# EAGLE board RAFT_DuckLink_RFH (EAGLE 9.5.2), part 1 of 2
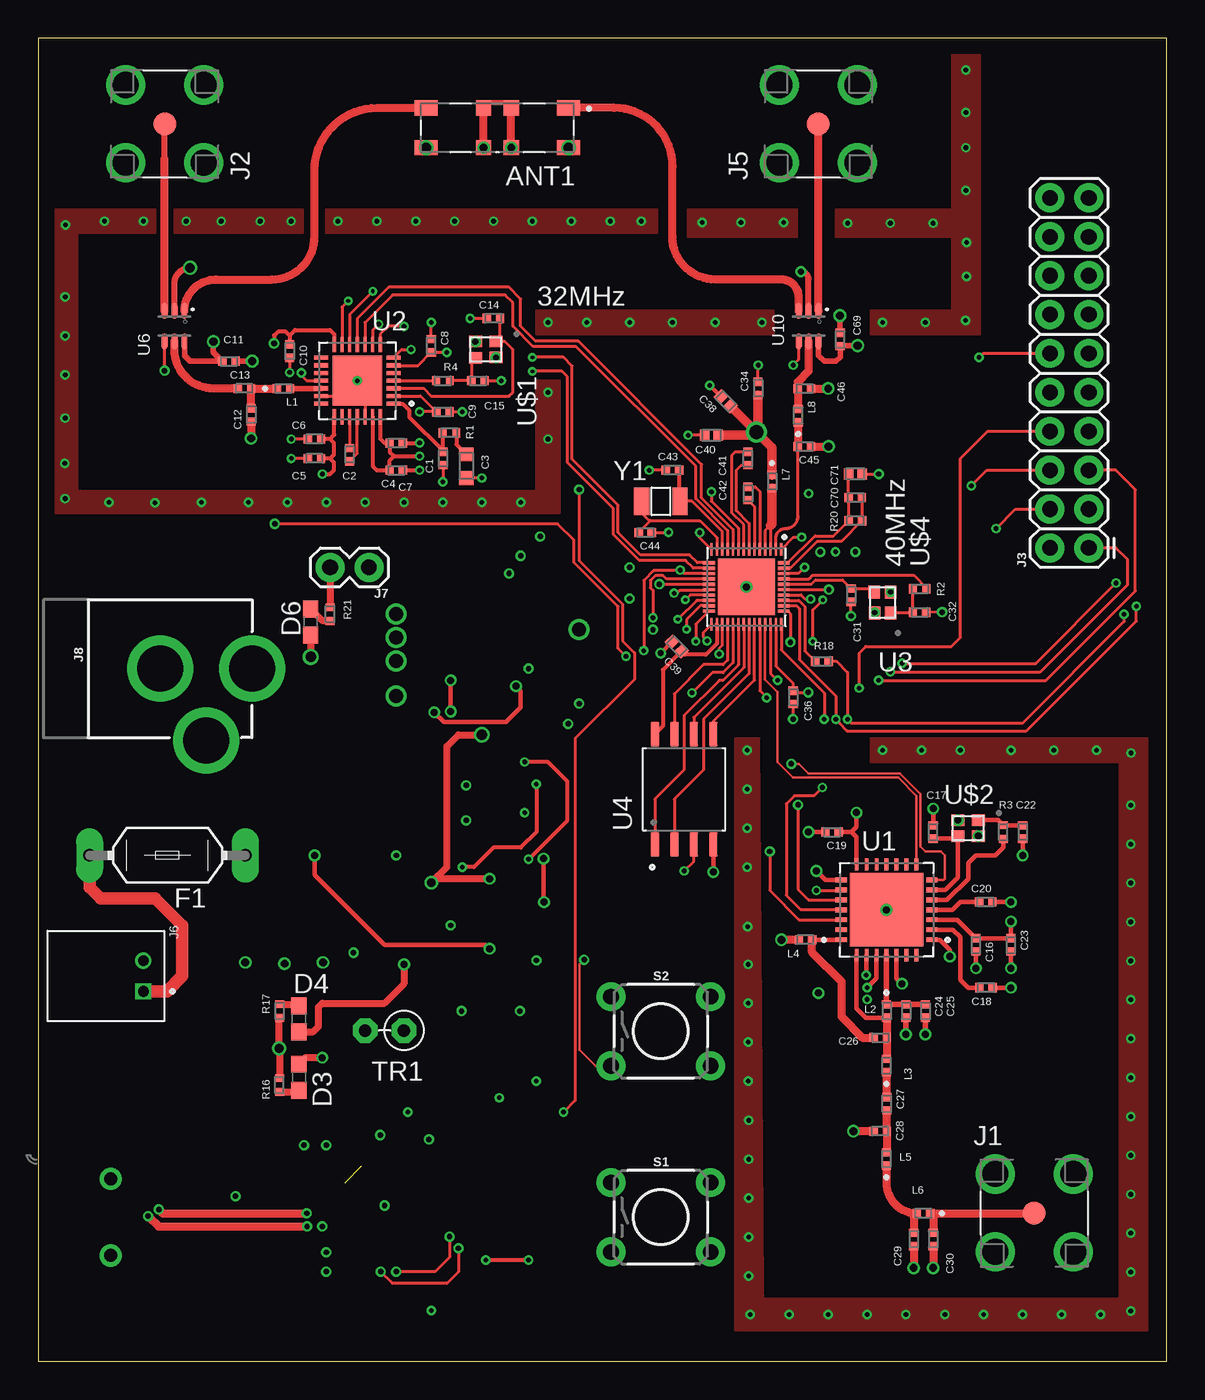
[diagram p0: board, top side]
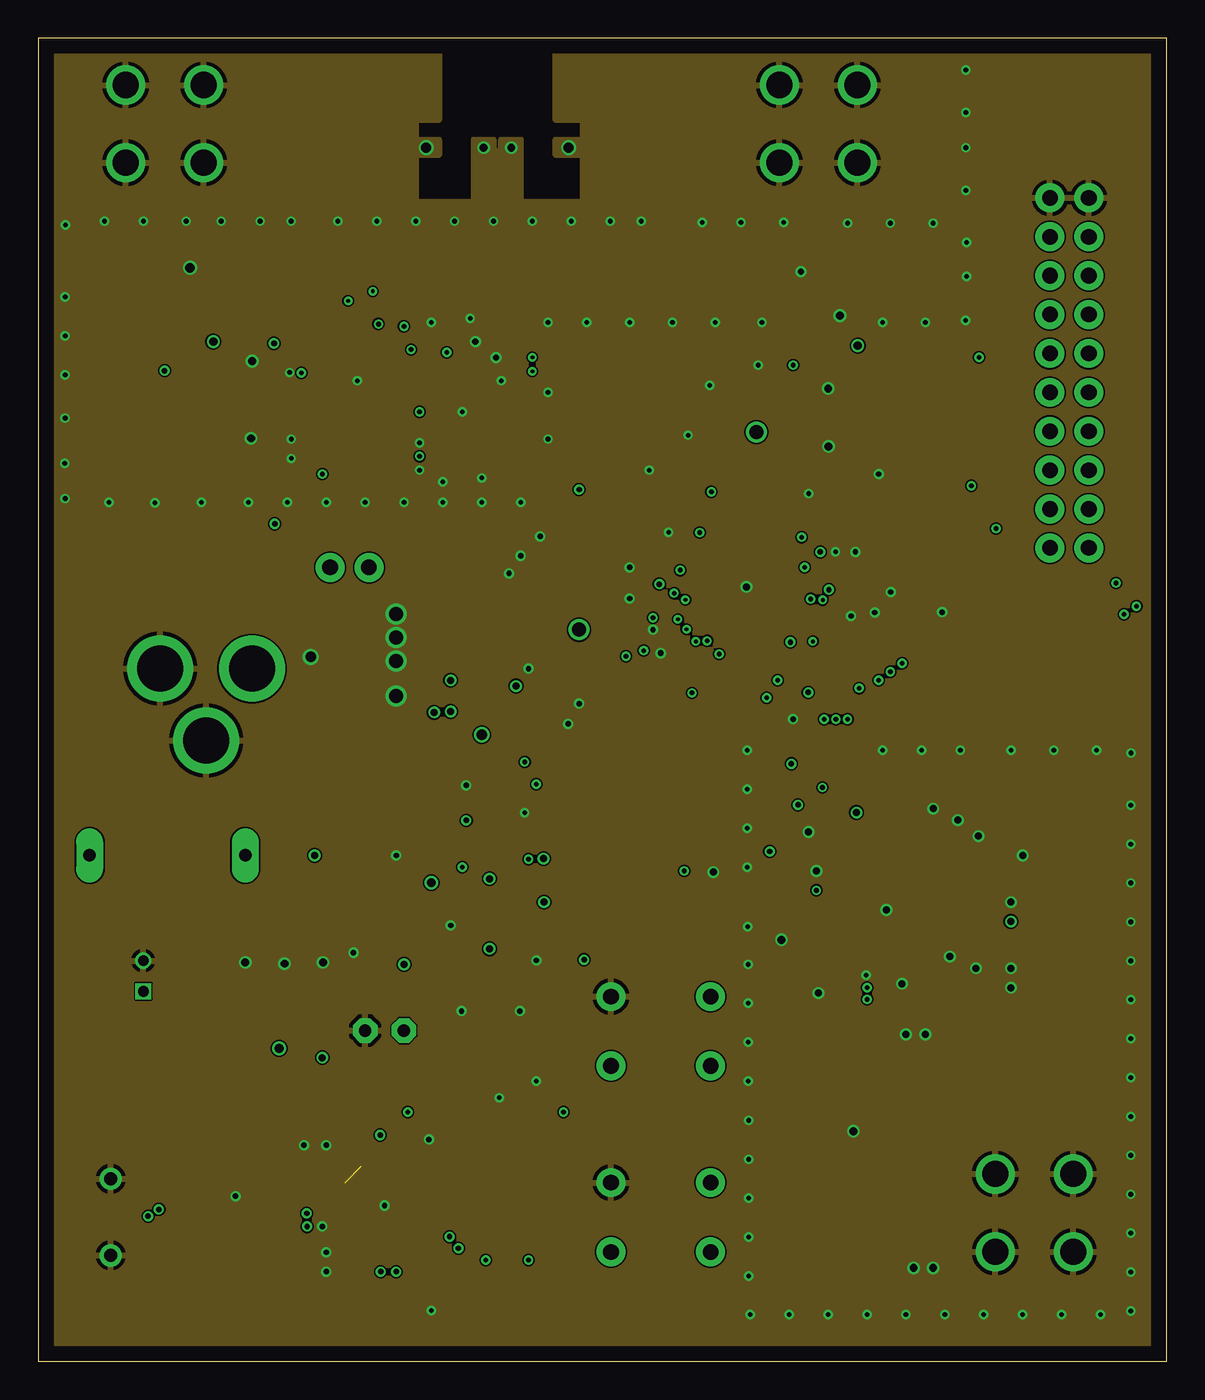
[diagram p1: board, inner layer GND]
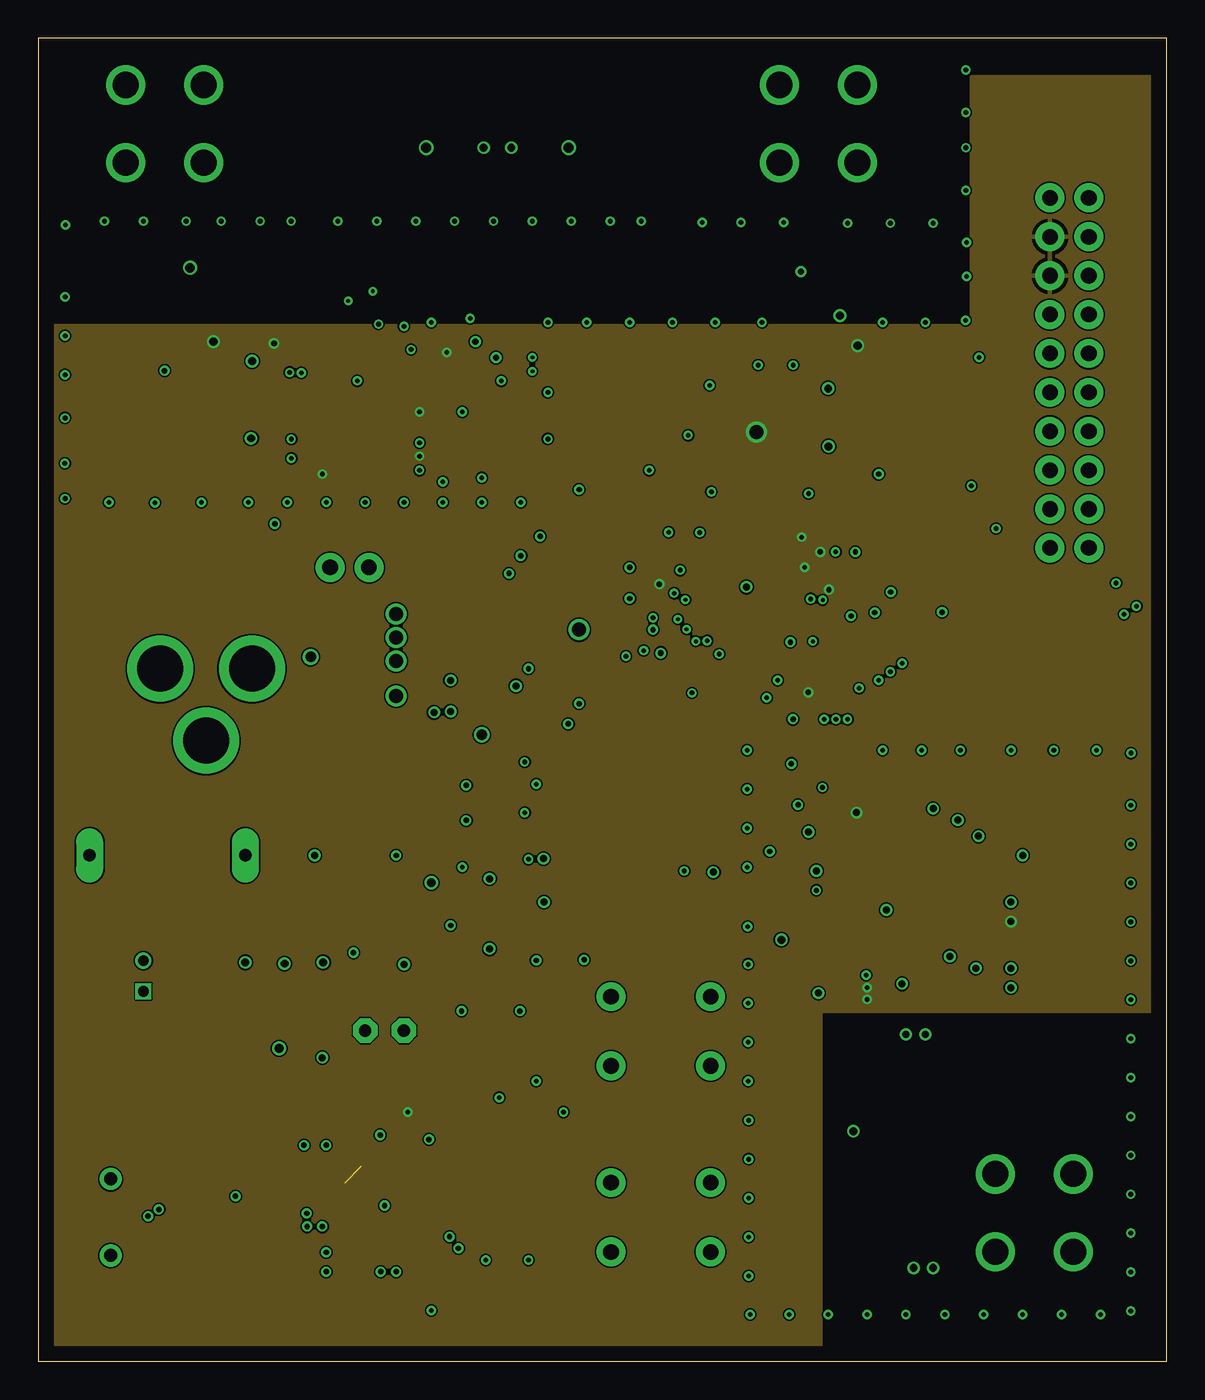
[diagram p2: board, inner layer 3V3]
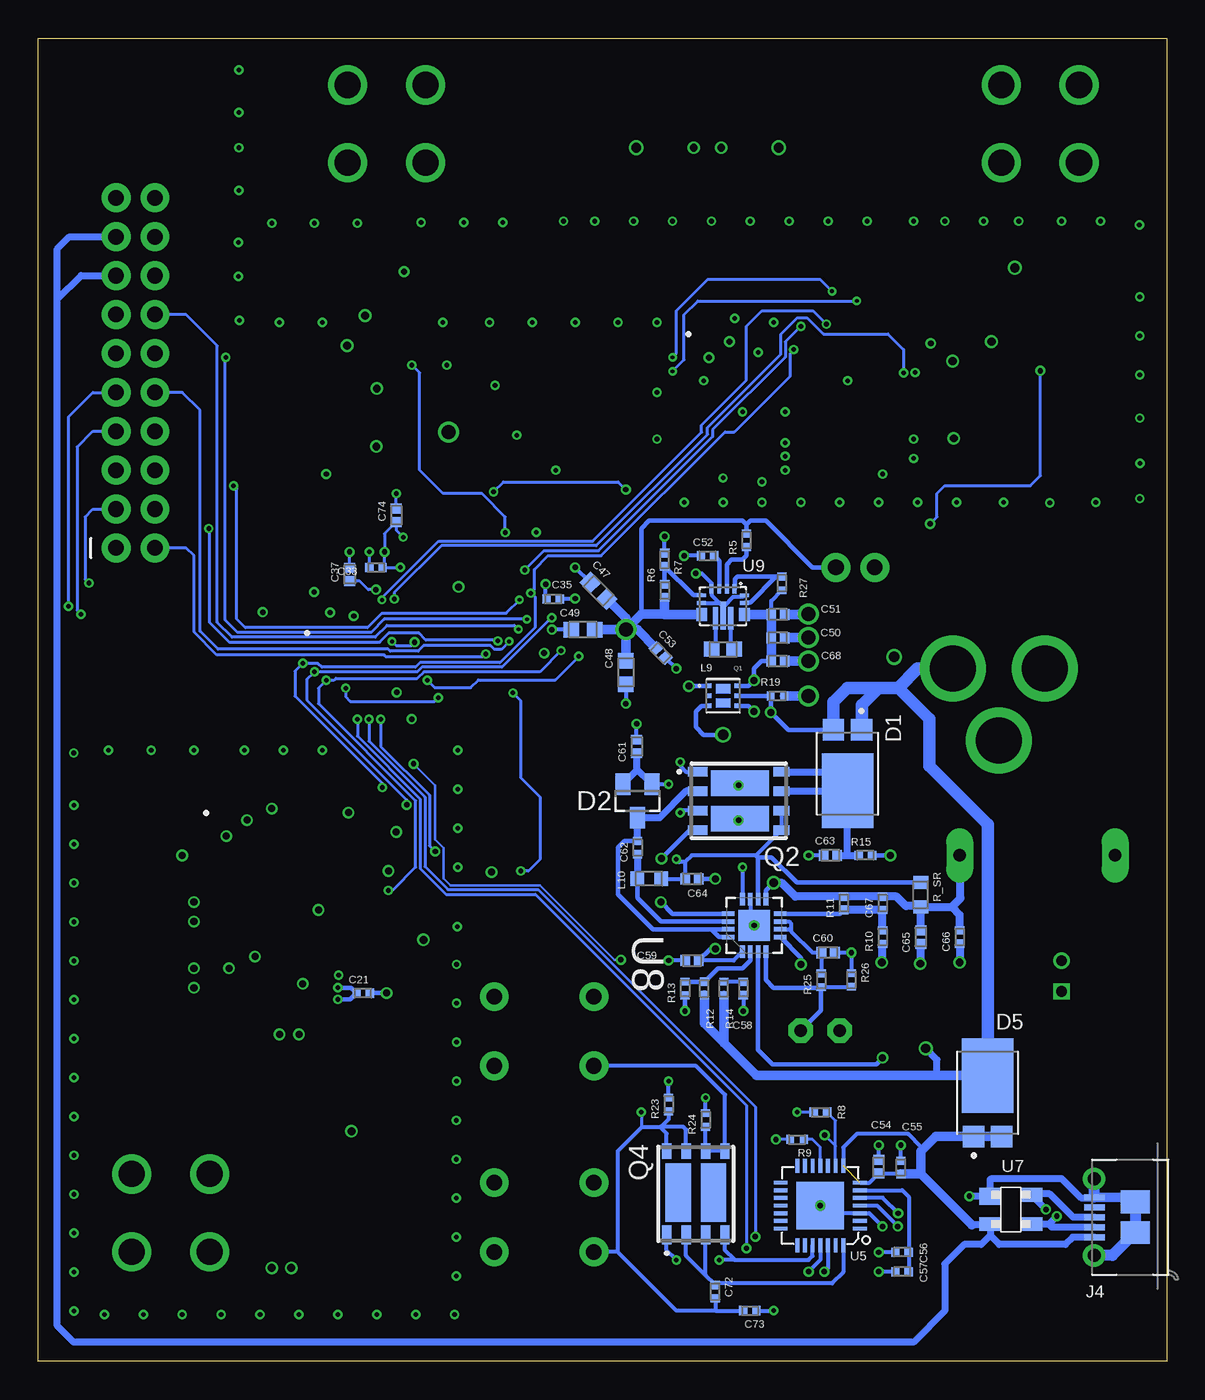
[diagram p3: board, bottom side, seen from below]

Size 73.66 x 86.36 mm. Coordinates in mm from the lower left corner, seen from the top.
Outline: 0,0 73.66,0 73.66,86.36 0,86.36 0,0
Copper layers (1+2*15+16): Top 0.05mm / dielectric 7.5mil / GND 0.035mm / dielectric 40mil / 3V3 0.035mm / dielectric 7.5mil / Bottom 0.05mm
Design rules "default *": minimum track width 6mil, minimum drill 6mil, track to track 4mil, track to pad 4mil, pad to pad 4mil, via to via 6mil, smd to smd 4mil, copper to edge 40mil, drill to drill 6mil, minimum pad ring 6mil, minimum via ring 6mil, stop-mask expansion 6mil, vias tented up to drill 6mil, thermal gap 10mil

## Footprints (pad centres in the part's own frame; a part is rotated, then mirrored left to right if it is on the bottom)
ANT_2450AD47A1590E = smd 1.5 x 1: 1 -4.65,-1.3; 4 4.65,-1.3; 5 4.65,1.3; 8 -4.65,1.3 | smd 1 x 1: 2 -0.9,-1.3; 3 0.9,-1.3; 6 0.9,1.3; 7 -0.9,1.3
CAPC1005X55N = smd 0.54 x 0.6: 1 -0.432,0; 2 0.432,0
CAPC1608X90N = smd 0.89 x 0.93: 1 -0.77,0; 2 0.77,0
CAPC1005X70N = smd 0.64 x 0.72: 1 -0.439,0; 2 0.439,0
CAPC1608X100N = smd 1 x 1.02: 1 -0.759,0; 2 0.759,0
DIO_PDS1040-13 = smd 1.4 x 1.39: 1 -2.856,0.92; 2 -2.856,-0.92 | smd 4.86 x 3.36: 3 1.126,0
SOT23 = smd 1 x 1.4: 1 -0.95,-1.1; 2 0.95,-1.1; 3 0,1.1
0603 = smd 1.1 x 1: 1 -0.85,0; 2 0.85,0
LITTLEFUSE = drill 0.813 pad 1.778 long: 1 -5.08,0; 2 5.08,0
AMPHENOL_132134-15 = smd 1.5 x 1.5: 1 0,0 | drill 1.7: P1 -2.54,2.54; P2 2.54,2.54; P3 2.54,-2.54; P4 -2.54,-2.54
2X10 = drill 1.016 pad 1.88: 1 0,0; 2 0,2.54; 3 2.54,0; 4 2.54,2.54; 5 5.08,0; 6 5.08,2.54; 7 7.62,0; 8 7.62,2.54; 9 10.16,0; 10 10.16,2.54; 11 12.7,0; 12 12.7,2.54; 13 15.24,0; 14 15.24,2.54; 15 17.78,0; 16 17.78,2.54; 17 20.32,0; 18 20.32,2.54; 19 22.86,0; 20 22.86,2.54
MOLEX_105017-0001 = smd 0.4 x 1.35: 1 -1.3,2.675; 2 -0.65,2.675; 3 0,2.675; 4 0.65,2.675; 5 1.3,2.675 | drill 0.85 pad 1.45: P$1 -2.5,2.7; P$2 2.5,2.7 | smd 1.5 x 1.9: P$8 -1,0; P$9 1,0
JST_S2B-PH-K-S(LF)(SN) = drill 0.7 square: 1 1,0 | drill 0.7: 2 -1,0
1X02 = drill 1.016 pad 1.88: 1 0,0; 2 2.54,0
POWER_JACK_PTH = drill 2.997 pad 4.318: GND 0,7.7; GNDBREAK 4.7,10.7; PWR 0,13.7
INDC1005X55N = smd 0.54 x 0.6: 1 -0.432,0; 2 0.432,0
INDC1608X95N = smd 1 x 0.97: 1 -0.735,0; 2 0.735,0
INDC1608X90N = smd 0.87 x 0.93: 1 -0.78,0; 2 0.78,0
POWERPAKSC-70 = smd 0.325 x 0.3: 1 -0.912,0.65; 2 -0.912,0; 3 -0.912,-0.65; 4 0.912,-0.65; 5 0.912,0; 6 0.912,0.65 | smd 0.95 x 0.613: 7 0,-0.467; 8 0,0.467
POWERPAK-SO8_1 = smd 1.27 x 0.61: 1 -2.67,1.905; 2 -2.67,0.635; 3 -2.67,-0.635; 4 -2.67,-1.905 | smd 1.02 x 0.61: 5 2.795,-1.905; 6 2.795,-0.635; 7 2.795,0.635; 8 2.795,1.905 | smd 3.81 x 1.65: 9 0.09,-1.155; 10 0.09,1.155
RESC1005X40N = smd 0.51 x 0.6: 1 -0.445,0; 2 0.445,0
RESC1005X35N = smd 0.56 x 0.6: 1 -0.435,0; 2 0.435,0
RESC1608X55N = smd 0.87 x 0.98: 1 -0.8,0; 2 0.8,0
TACTILE_SWITCH_PTH_6.0MM = drill 1.016 pad 1.88: 1 -3.251,2.261; 2 3.251,2.261; 3 -3.251,-2.261; 4 3.251,-2.261
RS-2,5 = drill 0.813 pad 1.6 octagon: 1 -1.27,0; 2 1.27,0
QFN65P600X600X100-29N = smd 0.81 x 0.32: 1 -2.955,1.95; 2 -2.955,1.3; 3 -2.955,0.65; 4 -2.955,0; 5 -2.955,-0.65; 6 -2.955,-1.3; 7 -2.955,-1.95; 15 2.955,-1.95; 16 2.955,-1.3; 17 2.955,-0.65; 18 2.955,0; 19 2.955,0.65; 20 2.955,1.3; 21 2.955,1.95 | smd 0.32 x 0.81: 8 -1.95,-2.955; 9 -1.3,-2.955; 10 -0.65,-2.955; 11 0,-2.955; 12 0.65,-2.955; 13 1.3,-2.955; 14 1.95,-2.955; 22 1.95,2.955; 23 1.3,2.955; 24 0.65,2.955; 25 0,2.955; 26 -0.65,2.955; 27 -1.3,2.955; 28 -1.95,2.955 | smd 4.8 x 4.8: 29 0,0
QFN50P500X500X80-29N = smd 0.99 x 0.27: 1 -2.36,1.5; 2 -2.36,1; 3 -2.36,0.5; 4 -2.36,0; 5 -2.36,-0.5; 6 -2.36,-1; 7 -2.36,-1.5; 15 2.36,-1.5; 16 2.36,-1; 17 2.36,-0.5; 18 2.36,0; 19 2.36,0.5; 20 2.36,1; 21 2.36,1.5 | smd 0.27 x 0.99: 8 -1.5,-2.36; 9 -1,-2.36; 10 -0.5,-2.36; 11 0,-2.36; 12 0.5,-2.36; 13 1,-2.36; 14 1.5,-2.36; 22 1.5,2.36; 23 1,2.36; 24 0.5,2.36; 25 0,2.36; 26 -0.5,2.36; 27 -1,2.36; 28 -1.5,2.36 | smd 3.25 x 3.25: 29 0,0
QFN35P500X500X90-49N = smd 0.81 x 0.2: 1 -2.445,2.275; 2 -2.445,1.925; 3 -2.445,1.575; 4 -2.445,1.225; 5 -2.445,0.875; 6 -2.445,0.525; 7 -2.445,0.175; 8 -2.445,-0.175; 9 -2.445,-0.525; 10 -2.445,-0.875; 11 -2.445,-1.225; 12 -2.445,-1.575; 13 -2.445,-1.925; 14 -2.445,-2.275; 25 2.445,-2.275; 26 2.445,-1.925; 27 2.445,-1.575; 28 2.445,-1.225; 29 2.445,-0.875; 30 2.445,-0.525; 31 2.445,-0.175; 32 2.445,0.175; 33 2.445,0.525; 34 2.445,0.875; 35 2.445,1.225; 36 2.445,1.575; 37 2.445,1.925; 38 2.445,2.275 | smd 0.2 x 0.81: 15 -1.575,-2.445; 16 -1.225,-2.445; 17 -0.875,-2.445; 18 -0.525,-2.445; 19 -0.175,-2.445; 20 0.175,-2.445; 21 0.525,-2.445; 22 0.875,-2.445; 23 1.225,-2.445; 24 1.575,-2.445; 39 1.575,2.445; 40 1.225,2.445; 41 0.875,2.445; 42 0.525,2.445; 43 0.175,2.445; 44 -0.175,2.445; 45 -0.525,2.445; 46 -0.875,2.445; 47 -1.225,2.445; 48 -1.575,2.445 | smd 3.7 x 3.7: 49 0,0
SOIC127P790X216-8N = smd 1.61 x 0.58: 1 -3.605,1.905; 2 -3.605,0.635; 3 -3.605,-0.635; 4 -3.605,-1.905; 5 3.605,-1.905; 6 3.605,-0.635; 7 3.605,0.635; 8 3.605,1.905
QFN28G_0.5-5X5MM = smd 0.9 x 0.254: 1 -2.59,1.5; 2 -2.59,1; 3 -2.59,0.5; 4 -2.59,0; 5 -2.59,-0.5; 6 -2.59,-1; 7 -2.59,-1.5; 15 2.59,-1.5; 16 2.59,-1; 17 2.59,-0.5; 18 2.59,0; 19 2.59,0.5; 20 2.59,1; 21 2.59,1.5 | smd 0.254 x 0.9: 8 -1.5,-2.59; 9 -1,-2.59; 10 -0.5,-2.59; 11 0,-2.59; 12 0.5,-2.59; 13 1,-2.59; 14 1.5,-2.59; 22 1.5,2.59; 23 1,2.59; 24 0.5,2.59; 25 0,2.59; 26 -0.5,2.59; 27 -1,2.59; 28 -1.5,2.59 | smd 3.1 x 3.1: 29 0,0
SOT65P215X110-6N = smd 1.05 x 0.4: 1 -1,0.65; 2 -1,0; 3 -1,-0.65; 4 1,-0.65; 5 1,0; 6 1,0.65
SOT143 = smd 1.4 x 1.1: 1 -1.35,0.86 | smd 1.4 x 0.9: 2 -1.35,-0.96; 3 1.35,-0.96; 4 1.35,0.96
QFN50P350X350X100-17N = smd 0.813 x 0.305: 1 -1.702,0.762; 2 -1.702,0.254; 3 -1.702,-0.254; 4 -1.702,-0.762; 9 1.702,-0.762; 10 1.702,-0.254; 11 1.702,0.254; 12 1.702,0.762 | smd 0.305 x 0.813: 5 -0.762,-1.702; 6 -0.254,-1.702; 7 0.254,-1.702; 8 0.762,-1.702; 13 0.762,1.702; 14 0.254,1.702; 15 -0.254,1.702; 16 -0.762,1.702 | smd 2.032 x 2.032: 17 0,0
QFN50P250X300X100-15N = smd 0.6 x 0.25: 1 -1.15,0.75; 2 -1.15,0.25; 3 -1.15,-0.25; 4 -1.15,-0.75 | smd 0.25 x 0.6: 5 -0.725,-1.4; 6 -0.225,-1.4; 14 -0.225,1.4; 15 -0.725,1.4 | smd 0.85 x 0.7: 7-8 0.525,-1.4; 12-13 0.525,1.4 | smd 1.45 x 0.35: 9 0.775,-0.5; 11 0.775,0.5 | smd 1.8 x 0.35: 10 0.6,0
SMD-4 = smd 0.85 x 0.75: 1 -0.675,-0.525; 2 0.675,-0.525; 3 0.675,0.535; 4 -0.675,0.525
OSCCC150X320X80-2N = smd 1 x 1.8: 1 -1.25,0; 2 1.25,0

## Placement (x,y rotation side)
ANT1  2450AD47A1590E  [ANT_2450AD47A1590E]  29.97,80.52 180 top
C1  15pF  [CAPC1005X55N]  26.42,58.93 90 top
C2  470pF  [CAPC1005X55N]  20.32,59.18 90 top
C3  750pF  [CAPC1608X90N]  27.94,58.42 90 top
C4  0.1uF  [CAPC1005X55N]  23.37,59.94 180 top
C5  100pF  [CAPC1005X55N]  18.03,58.93 0 top
C6  0.1uF  [CAPC1005X55N]  18.03,60.2 0 top
C7  0.1uF  [CAPC1005X55N]  23.37,58.17 180 top
C8  0.1uF  [CAPC1005X55N]  25.65,66.29 270 top
C9  0.1uF  [CAPC1005X55N]  26.42,61.98 180 top
C10  0.1uF  [CAPC1005X55N]  16.41,65.94 90 top
C11  1nF  [CAPC1005X55N]  12.45,65.28 180 top
C12  1.7pF  [CAPC1005X55N]  13.89,61.77 90 top
C13  470pF  [CAPC1005X55N]  13.46,63.5 0 top
C14  10nF  [CAPC1005X55N]  29.72,68.07 0 top
C15  10nF  [CAPC1005X55N]  28.7,64.01 180 top
C16  0.1uF  [CAPC1005X55N]  61.21,27.18 270 top
C17  15pF  [CAPC1005X55N]  58.42,34.54 270 top
C18  0.1uF  [CAPC1005X55N]  61.87,24.38 0 top
C19  0.1uF  [CAPC1005X55N]  51.82,34.54 180 top
C20  0.1uF  [CAPC1005X55N]  61.85,29.97 0 top
C21  0.1uF  [CAPC1005X55N]  52.45,24.03 0 bottom
C22  15pF  [CAPC1005X55N]  64.26,34.54 90 top
C23  47nF  [CAPC1005X55N]  63.5,27.18 270 top
C24  47nF  [CAPC1005X55N]  56.64,22.86 90 top
C25  10nF  [CAPC1005X55N]  57.91,22.86 90 top
C26  1.5pF  [CAPC1005X55N]  54.97,21.13 180 top
C27  33pF  [CAPC1005X55N]  55.4,16.81 270 top
C28  4.7pF  [CAPC1005X55N]  54.97,15.01 0 top
C29  4.7pF  [CAPC1005X55N]  57.15,7.95 90 top
C30  1.8pF  [CAPC1005X55N]  58.42,7.95 90 top
C31  15pF  [CAPC1005X55N]  53.06,50.01 90 top
C32  15pF  [CAPC1005X55N]  57.53,48.9 180 top
C33  100pF  [CAPC1005X55N]  51.61,51.82 180 bottom
C34  0.1uF  [CAPC1005X55N]  46.99,63.5 90 top
C35  0.1uF  [CAPC1005X55N]  40.06,49.76 180 bottom
C36  0.1uF  [CAPC1005X55N]  49.28,43.33 90 top
C37  1uF  [CAPC1005X70N]  53.34,51.36 90 bottom
C38  1uF  [CAPC1005X70N]  44.88,62.66 135 top
C39  1uF  [CAPC1005X70N]  41.68,46.66 315 top
C40  10uF  [CAPC1005X70N]  43.94,60.45 180 top
C41  270pF  [CAPC1005X55N]  46.33,58.93 270 top
C42  270pF  [CAPC1005X55N]  46.33,56.64 90 top
C43  15pF  [CAPC1005X55N]  41.4,58.17 0 top
C44  15pF  [CAPC1005X55N]  39.62,54.1 180 top
C45  15pF  [CAPC1005X55N]  50.01,59.72 180 top
C46  15pF  [CAPC1005X55N]  50.01,63.5 180 top
C47  22uF  [CAPC1608X100N]  37.08,50.29 315 bottom
C48  22uF  [CAPC1608X100N]  35.31,44.96 90 bottom
C49  22uF  [CAPC1608X100N]  38.1,47.75 0 bottom
C50  10uF  [CAPC1005X70N]  25.37,47.22 0 bottom
C51  10uF  [CAPC1005X70N]  25.37,48.74 0 bottom
C52  0.1uF  [CAPC1005X55N]  29.97,52.58 180 bottom
C53  10uF  [CAPC1005X70N]  33.02,46.23 315 bottom
C54  1.0uF  [CAPC1005X70N]  18.8,12.7 270 bottom
C55  0.1uF  [CAPC1005X55N]  17.35,12.65 270 bottom
C56  0.1uF  [CAPC1005X55N]  17.27,7.11 0 bottom
C57  4.7uF  [CAPC1005X55N]  17.27,5.84 0 bottom
C58  2.2uF  [CAPC1005X55N]  27.64,24.33 90 bottom
C59  1.0uF  [CAPC1005X70N]  30.99,26.16 180 bottom
C60  1.0uF  [CAPC1005X70N]  22.1,26.67 0 bottom
C61  1.0uF  [CAPC1005X70N]  34.59,40.13 90 bottom
C62  0.1uF  [CAPC1005X55N]  34.54,33.53 90 bottom
C63  10uF  [CAPC1005X70N]  21.95,33.02 0 bottom
C64  10uF  [CAPC1005X70N]  30.99,31.5 180 bottom
C65  10uF  [CAPC1005X70N]  16.05,27.69 90 bottom
C66  4.7uF  [CAPC1005X55N]  13.51,27.69 90 bottom
C67  22pF  [CAPC1005X55N]  18.54,29.9 90 bottom
C68  10uF  [CAPC1005X70N]  25.37,45.69 0 bottom
C69  1nF  [CAPC1005X55N]  52.35,66.7 270 top
C70  3.3nF  [CAPC1005X55N]  53.34,56.39 180 top
C71  10uF  [CAPC1005X70N]  53.34,57.91 0 top
C72  0.1uF  [CAPC1005X55N]  29.46,4.55 270 bottom
C73  2.2uF  [CAPC1005X55N]  27.2,3.3 180 bottom
C74  1uF  [CAPC1005X70N]  50.29,55.22 90 bottom
D1  PDS1040-13  [DIO_PDS1040-13]  20.83,38.35 270 bottom
D2  BAT54C  [SOT23]  34.54,36.58 180 bottom
D3  LTST-C190GKT  [0603]  17.02,18.54 270 top
D4  LTST-C190GKT  [0603]  17.02,22.35 90 top
D5  PDS1040-13  [DIO_PDS1040-13]  11.68,17.53 90 bottom
D6  LTST-C190GKT  [0603]  17.78,48.26 90 top
F1  [LITTLEFUSE]  8.43,33.02 180 top
J1  AMPHENOL_132134  [AMPHENOL_132134-15]  65.02,9.68 90 top
J2  AMPHENOL_132134  [AMPHENOL_132134-15]  8.26,80.77 0 top
J3  [2X10]  68.58,53.09 90 top
J4  Micro-USB  [MOLEX_105017-0001]  2.03,9.4 90 bottom
J5  132134-15  [AMPHENOL_132134-15]  50.93,80.77 0 top
J6  S2B-PH-K-S(LF)(SN)  [JST_S2B-PH-K-S(LF)(SN)]  6.86,25.15 270 top
J7  [1X02]  21.59,51.82 180 top
J8  POWER_JACK  [POWER_JACK_PTH]  0.25,45.21 270 top
L1  6.8nH  [INDC1005X55N]  16,63.5 180 top
L2  33nF  [INDC1005X55N]  55.37,22.86 90 top
L3  10nH  [INDC1005X55N]  55.37,19.3 270 top
L4  5.6nH  [INDC1005X55N]  50.09,27.51 0 top
L5  8.2nH  [INDC1005X55N]  55.37,13.21 270 top
L6  7.5nH  [INDC1005X55N]  57.78,9.65 0 top
L7  2nH  [INDC1005X55N]  47.9,57.43 90 top
L8  5.6nH  [INDC1005X55N]  49.61,61.72 270 top
L9  1.5uH  [INDC1608X95N]  28.96,46.48 180 bottom
L10  10uH  [INDC1608X90N]  33.78,31.5 0 bottom
Q1  SIA817EDJ  [POWERPAKSC-70]  28.96,43.43 0 bottom
Q2  SI7288DP  [POWERPAK-SO8_1]  27.94,36.58 0 bottom
Q4  SI7288DP  [POWERPAK-SO8_1]  30.73,10.92 90 bottom
R1  15K  [RESC1005X40N]  26.85,60.6 0 top
R2  0R  [RESC1005X40N]  57.53,50.42 180 top
R3  0R  [RESC1005X40N]  62.99,34.54 270 top
R4  0R  [RESC1005X40N]  26.42,64.01 180 top
R5  100k  [RESC1005X40N]  27.43,53.59 90 bottom
R6  470k  [RESC1005X35N]  32.77,50.29 90 bottom
R7  150k  [RESC1005X35N]  32.77,52.32 270 bottom
R8  4.7k  [RESC1005X35N]  22.61,16.26 180 bottom
R9  10k  [RESC1005X40N]  24.13,14.48 180 bottom
R10  100k  [RESC1005X40N]  18.54,27.69 90 bottom
R11  499R  [RESC1005X35N]  21.08,29.9 90 bottom
R12  499R  [RESC1005X35N]  30.18,24.33 270 bottom
R13  36k  [RESC1005X40N]  31.45,24.33 90 bottom
R14  2k  [RESC1005X40N]  28.91,24.33 270 bottom
R15  10  [RESC1005X35N]  19.66,33.02 0 bottom
R16  10K  [RESC1005X40N]  15.75,18.03 270 top
R17  10K  [RESC1005X40N]  15.75,22.86 90 top
R18  499R  [RESC1005X35N]  51.16,45.69 180 top
R19  100k  [RESC1005X40N]  25.4,43.43 180 bottom
R20  20k  [RESC1005X35N]  53.34,54.86 0 top
R21  10K  [RESC1005X40N]  19.05,48.77 270 top
R23  10k  [RESC1005X40N]  32.51,16.76 90 bottom
R24  10k  [RESC1005X40N]  30.1,15.75 90 bottom
R25  5.23k  [RESC1005X40N]  22.56,24.87 90 bottom
R26  30.1k  [RESC1005X40N]  20.57,24.89 270 bottom
R27  10k  [RESC1005X40N]  25.12,50.77 90 bottom
R_SR  20m  [RESC1608X55N]  16.05,30.45 270 bottom
S1  MOMENTARY-SWITCH-SPST-PTH-6.0MM  [TACTILE_SWITCH_PTH_6.0MM]  40.64,9.4 0 top
S2  MOMENTARY-SWITCH-SPST-PTH-6.0MM  [TACTILE_SWITCH_PTH_6.0MM]  40.64,21.54 0 top
TR1  [RS-2,5]  22.61,21.59 180 top
U1  SX1276  [QFN65P600X600X100-29N]  55.37,29.46 180 top
U2  MAX2771ETI+  [QFN50P500X500X80-29N]  20.83,64.01 180 top
U3  ESP32-D0WD  [QFN35P500X500X90-49N]  46.23,50.55 270 top
U4  W25Q16BVSSIG  [SOIC127P790X216-8N]  42.16,37.34 90 top
U5  INTERFACE-CP2102-GMR(QFN28)  [QFN28G_0.5-5X5MM]  22.61,10.16 180 bottom
U6  PE4259  [SOT65P215X110-6N]  8.89,67.56 270 top
U7  SP0503BAHT  [SOT143]  10.16,9.91 0 bottom
U8  BQ24650RVAR  [QFN50P350X350X100-17N]  26.92,28.45 90 bottom
U9  TPS63070RNMT  [QFN50P250X300X100-15N]  28.96,49.28 270 bottom
U10  PE4259  [SOT65P215X110-6N]  50.29,67.56 270 top
U$1  32MHz  [SMD-4]  29.21,66.04 180 top
U$2  32MHz  [SMD-4]  60.71,34.8 180 top
U$4  40MHz  [SMD-4]  55.12,49.53 90 top
Y1  32.768kHz  [OSCCC150X320X80-2N]  40.64,56.13 180 top

## Library data of the parts
ANT1 = RAFT-components; DESCRIPTION: 1.561GHz, 1.575GHz, 1.602GHz, 2.4GHz Beidou, Bluetooth, GLONASS, GPS, Wi-Fi Chip RF Antenna 1.561GHz ~ 1.602GHz, 2.4GHz ~ 2.5GHz 0.5dBi, 1.5dBi, 1.5dBi, 1dBi Solder Surface Mount; DIGI-KEY_PART_NUMBER: 712-1594-1-ND; DIGI-KEY_PURCHASE_URL: https://www.digikey.com/product-detail/en/johanson-technology-inc/2450AD47A1590E/712-1594-1-ND/5980452?utm_source=snapeda&utm_medium=aggregator&utm_campaign=symbol; MF: Johanson Technology; MP: 2450AD47A1590E; PACKAGE: FBGA-780 Johanson Technology
C1 C43-C46 = rcl-raft; DESCRIPTION: Cap Ceramic 15pF 50V C0G 5% Pad SMD 0402 125C Automotive T/R; DIGI-KEY_PART_NUMBER: 490-11147-1-ND; DIGI-KEY_PURCHASE_URL: https://www.digikey.com/product-detail/en/murata-electronics/GCM1555C1H150JA16D/490-11147-1-ND/5332987?utm_source=snapeda&utm_medium=aggregator&utm_campaign=symbol; MF: Murata; MP: GCM1555C1H150JA16D; PACKAGE: 1005 Taiyo Yuden
C2 C13 = rcl-raft; DESCRIPTION: CAP CER 470PF 50V C0G/NP0 0402; DIGI-KEY_PART_NUMBER: 490-4758-1-ND; DIGI-KEY_PURCHASE_URL: https://www.digikey.com/product-detail/en/murata-electronics/GCM1555C1H471JA16D/490-4758-1-ND/1641677?utm_source=snapeda&utm_medium=aggregator&utm_campaign=symbol; MF: Murata; MP: GCM1555C1H471JA16D; PACKAGE: 1005 Taiyo Yuden
C3 = rcl-raft; DESCRIPTION: Cap Ceramic 750pF 100V C0G 5% SMD 0603 125°C Paper T/R; DIGI-KEY_PART_NUMBER: GCM1885C2A751JA16D-ND; DIGI-KEY_PURCHASE_URL: https://www.digikey.com/product-detail/en/murata-electronics/GCM1885C2A751JA16D/GCM1885C2A751JA16D-ND/2591804?utm_source=snapeda&utm_medium=aggregator&utm_campaign=symbol; MF: Murata; MP: GCM1885C2A751JA16D; PACKAGE: 1608 Murata
C4 C6-C10 C34-C36 = rcl-raft; DESCRIPTION: Cap Ceramic 0.1uF 16V X7R 10% Pad SMD 0402 125°C Automotive T/R; DIGI-KEY_PART_NUMBER: 490-7998-1-ND; DIGI-KEY_PURCHASE_URL: https://www.digikey.com/product-detail/en/murata-electronics/GCM155R71C104KA55J/490-7998-1-ND/4380283?utm_source=snapeda&utm_medium=aggregator&utm_campaign=symbol; MF: Murata; MP: GCM155R71C104KA55J; PACKAGE: 1005 Taiyo Yuden
C5 C33 = rcl-raft; DESCRIPTION: 100pF ±5% 50V Ceramic Capacitor C0G, NP0 0402 _1005 Metric_; DIGI-KEY_PART_NUMBER: 490-10669-1-ND; DIGI-KEY_PURCHASE_URL: https://www.digikey.com/product-detail/en/murata-electronics/GCM1555C1H101JA16D/490-10669-1-ND/5251436?utm_source=snapeda&utm_medium=aggregator&utm_campaign=symbol; MF: Murata; MP: GCM1555C1H101JA16D; PACKAGE: 1005 Taiyo Yuden
C11 C69 = rcl-raft; DESCRIPTION: Cap Ceramic 0.001uF 50V X7R 10% Pad SMD 0402 125C Automotive T/R; DIGI-KEY_PART_NUMBER: 490-4761-1-ND; DIGI-KEY_PURCHASE_URL: https://www.digikey.com/product-detail/en/murata-electronics/GCM155R71H102KA37D/490-4761-1-ND/1641680?utm_source=snapeda&utm_medium=aggregator&utm_campaign=symbol; MF: Murata; MP: GCM155R71H102KA37D; PACKAGE: 1005 Taiyo Yuden
C12 = rcl-raft; DESCRIPTION: Cap Auto-Grade 1.7pf 50vdc C0g 0.25pf Smd 0402; DIGI-KEY_PART_NUMBER: GCM1555C1H1R7CA16D-ND; DIGI-KEY_PURCHASE_URL: https://www.digikey.com/product-detail/en/murata-electronics/GCM1555C1H1R7CA16D/GCM1555C1H1R7CA16D-ND/4903569?utm_source=snapeda&utm_medium=aggregator&utm_campaign=symbol; MF: Murata; MP: GCM1555C1H1R7CA16D; PACKAGE: 1005 Taiyo Yuden
C14 C15 = rcl-raft; COPYRIGHT: Copyright (C) 2015 Accelerated Designs. All rights reserved; MANUFACTURER_PART_NUMBER: GCM155R71H103KA55D; VENDOR: Murata
C16 C18-C21 C52 C55 C56 C62 C72 = RAFT-components; DESCRIPTION: Cap Ceramic 0.1uF 16V X7R 10% Pad SMD 0402 125°C Automotive T/R; DIGI-KEY_PART_NUMBER: 490-7998-1-ND; DIGI-KEY_PURCHASE_URL: https://www.digikey.com/product-detail/en/murata-electronics/GCM155R71C104KA55J/490-7998-1-ND/4380283?utm_source=snapeda&utm_medium=aggregator&utm_campaign=symbol; MF: Murata; MP: GCM155R71C104KA55J; PACKAGE: 1005 Taiyo Yuden
C17 C22 C31 C32 = RAFT-components; DESCRIPTION: Cap Ceramic 15pF 50V C0G 5% Pad SMD 0402 125C Automotive T/R; DIGI-KEY_PART_NUMBER: 490-11147-1-ND; DIGI-KEY_PURCHASE_URL: https://www.digikey.com/product-detail/en/murata-electronics/GCM1555C1H150JA16D/490-11147-1-ND/5332987?utm_source=snapeda&utm_medium=aggregator&utm_campaign=symbol; MF: Murata; MP: GCM1555C1H150JA16D; PACKAGE: 1005 Taiyo Yuden
C23 C24 = RAFT-components; DESCRIPTION: Cap Ceramic 0.047uF 16V X7R 10% Pad SMD 0402 125C Automotive T/R; DIGI-KEY_PART_NUMBER: 490-6042-1-ND; DIGI-KEY_PURCHASE_URL: https://www.digikey.com/product-detail/en/murata-electronics/GCM155R71C473KA37D/490-6042-1-ND/3845242?utm_source=snapeda&utm_medium=aggregator&utm_campaign=symbol; MF: Murata; MP: GCM155R71C473KA37D; PACKAGE: 1005 Taiyo Yuden
C25 = RAFT-components; COPYRIGHT: Copyright (C) 2015 Accelerated Designs. All rights reserved; MANUFACTURER_PART_NUMBER: GCM155R71H103KA55D; VENDOR: Murata
C26 = RAFT-components; DESCRIPTION: Cap Auto-Grade 1.5pf 50vdc C0g 5% Smd 0402; DIGI-KEY_PART_NUMBER: 490-16452-1-ND; DIGI-KEY_PURCHASE_URL: https://www.digikey.com/product-detail/en/murata-electronics/GCM1555C1H1R5JA16D/490-16452-1-ND/7363434?utm_source=snapeda&utm_medium=aggregator&utm_campaign=symbol; MF: Murata Electronics; MP: GCM1555C1H1R5JA16D; PACKAGE: 1005 Taiyo Yuden
C27 = RAFT-components; DESCRIPTION: CAP CER 33PF 50V C0G/NP0 0402; MF: Murata; MP: GCM1555C1H330JA16D; PACKAGE: 1005 Taiyo Yuden
C28 C29 = RAFT-components; DESCRIPTION: 0402 4.7 pF 50V ±0.25 pF Tolerance C0G SMT Multilayer Ceramic Capacitor; DIGI-KEY_PART_NUMBER: 490-12652-1-ND; DIGI-KEY_PURCHASE_URL: https://www.digikey.com/product-detail/en/murata-electronics/GCM1555C1H4R7CA16D/490-12652-1-ND/5797621?utm_source=snapeda&utm_medium=aggregator&utm_campaign=symbol; MF: Murata Electronics; MP: GCM1555C1H4R7CA16D; PACKAGE: 1005 Taiyo Yuden
C30 = RAFT-components; DESCRIPTION: Cap Ceramic 1.8pF 50V C0G 0.25pF Pad SMD 0402 125C Automotive T/R; DIGI-KEY_PART_NUMBER: 490-17746-1-ND; DIGI-KEY_PURCHASE_URL: https://www.digikey.com/product-detail/en/murata-electronics/GCM1555C1H1R8CA16D/490-17746-1-ND/8539982?utm_source=snapeda&utm_medium=aggregator&utm_campaign=symbol; MF: Murata Electronics; MP: GCM1555C1H1R8CA16D; PACKAGE: 1005 Taiyo Yuden
C37-C39 C74 = rcl-raft; DESCRIPTION: Cap Ceramic 1uF 10V X7S 10% Pad SMD 0402 125C Automotive T/R; DIGI-KEY_PART_NUMBER: 490-13409-1-ND; DIGI-KEY_PURCHASE_URL: https://www.digikey.com/product-detail/en/murata-electronics/GCM155C71A105KE38D/490-13409-1-ND/6012281?utm_source=snapeda&utm_medium=aggregator&utm_campaign=symbol; MF: Murata; MP: GCM155C71A105KE38D; PACKAGE: 1005 Murata
C40 C50 C51 C53 C63-C65 C68 C71 = RAFT-components; DESCRIPTION: 10µF ±20% 6.3V Ceramic Capacitor X6S 0402 _1005 Metric_; DIGI-KEY_PART_NUMBER: 490-13233-1-ND; DIGI-KEY_PURCHASE_URL: https://www.digikey.com/product-detail/en/murata-electronics/GRM155C80J106ME11D/490-13233-1-ND/5877441?utm_source=snapeda&utm_medium=aggregator&utm_campaign=symbol; MF: Murata Electronics; MP: GRM155C80J106ME11D; PACKAGE: 1005 Murata
C41 C42 = rcl-raft; DESCRIPTION: Multilayer Ceramic Capacitor, GRM Series, 270 pF, 5%, C0G / NP0, 50 V, 0402 [1005 Metric]; DIGI-KEY_PART_NUMBER: 490-1294-1-ND; DIGI-KEY_PURCHASE_URL: https://www.digikey.com/product-detail/en/murata-electronics/GRM1555C1H271JA01D/490-1294-1-ND/587902?utm_source=snapeda&utm_medium=aggregator&utm_campaign=symbol; MF: Murata; MP: GRM1555C1H271JA01D; PACKAGE: 1005 Taiyo Yuden
C47-C49 = RAFT-components; DESCRIPTION: Cap Ceramic 22uF 6.3V X5R 20% Pad SMD 0603 85°C T/R; DIGI-KEY_PART_NUMBER: 490-7611-1-ND; DIGI-KEY_PURCHASE_URL: https://www.digikey.com/product-detail/en/murata-electronics/GRM188R60J226MEA0D/490-7611-1-ND/4280544?utm_source=snapeda&utm_medium=aggregator&utm_campaign=symbol; MF: Murata; MP: GRM188R60J226MEA0D; PACKAGE: 1608 Murata
C54 C59-C61 = GCM155C71A105KE38D; AVAILABILITY: Unavailable; DESCRIPTION: Cap Ceramic 1uF 10V X7S 10% Pad SMD 0402 125C Automotive T/R; MF: Murata; MP: GCM155C71A105KE38D; PACKAGE: 1005 Murata; PRICE: None
C57 C66 = GRM155R60J475ME87D; AVAILABILITY: Unavailable; DESCRIPTION: 4.7µF ±20% 6.3V Ceramic Capacitor X5R 0402 _1005 Metric_; MF: Murata; MP: GRM155R60J475ME87D; PACKAGE: 1005 Taiyo Yuden; PRICE: None
C58 = GRM155D80J225ME95D; DESCRIPTION: 2.2µF ±20% 6.3V Ceramic Capacitor X6T 0402 _1005 Metric_; DIGI-KEY_PART_NUMBER: 490-10450-1-ND; DIGI-KEY_PURCHASE_URL: https://www.digikey.com/product-detail/en/murata-electronics/GRM155D80J225ME95D/490-10450-1-ND/5026360?utm_source=snapeda&utm_medium=aggregator&utm_campaign=symbol; MF: Murata; MP: GRM155D80J225ME95D; PACKAGE: 1005 Taiyo Yuden
C67 = GCM1555C1H220JA16J; DESCRIPTION: Cap Ceramic 22pF 50V C0G 5% Pad SMD 0402 125C Automotive T/R; DIGI-KEY_PART_NUMBER: 490-17747-1-ND; DIGI-KEY_PURCHASE_URL: https://www.digikey.com/product-detail/en/murata-electronics/GCM1555C1H220JA16J/490-17747-1-ND/8539983?utm_source=snapeda&utm_medium=aggregator&utm_campaign=symbol; MF: Murata; MP: GCM1555C1H220JA16J; PACKAGE: 1005 Taiyo Yuden
C70 = RAFT-components; DESCRIPTION: SMD Capacitor X7R_EIA_ with Capacitance: 3300pF Tol. 10%. Rated Voltage: 50Vdc; DIGI-KEY_PART_NUMBER: 490-8001-1-ND; DIGI-KEY_PURCHASE_URL: https://www.digikey.com/product-detail/en/murata-electronics/GCM155R71H332KA37D/490-8001-1-ND/4380286?utm_source=snapeda&utm_medium=aggregator&utm_campaign=symbol; MF: Murata; MP: GCM155R71H332KA37D; PACKAGE: 1005 Taiyo Yuden
C73 = RAFT-components; DESCRIPTION: SMD Capacitor X6T_EIA_ with Capacitance: 2.2uF Tol. 20%. Rated Voltage: 6.3Vdc; DIGI-KEY_PART_NUMBER: 490-10450-1-ND; DIGI-KEY_PURCHASE_URL: https://www.digikey.com/product-detail/en/murata-electronics/GRM155D80J225ME95D/490-10450-1-ND/5026360?utm_source=snapeda&utm_medium=aggregator&utm_campaign=symbol; MF: Murata; MP: GRM155D80J225ME95D; PACKAGE: 1005 Taiyo Yuden
D1 D5 = PDS1040-13; AVAILABILITY: Unavailable; DESCRIPTION: Diode Schottky 40V 10A Surface Mount PowerDI™ 5; MF: Diodes Inc.; MP: PDS1040-13; PACKAGE: PowerDI™-5 Diodes Inc.; PRICE: None
D2 = diode
D3 D4 D6 = LTST-C190GKT; AVAILABILITY: Unavailable; DESCRIPTION: Green 569nm LED Indication - Discrete 2.1V 0603 _1608 Metric_; MF: Lite-On Inc.; MP: LTST-C190GKT; PACKAGE: 0603 Lite-On; PRICE: None
F1 = fuse; OC_FARNELL: unknown; OC_NEWARK: unknown
J1 J2 = AmphenolRF; AVAILABILITY: Unavailable; DESCRIPTION: RF Connector SMA Straight PCB Jack Surface Mount 50 Ohm; MF: Amphenol RF; MP: 132134-15; PACKAGE: None; PRICE: None
J3 J7 = SparkFun-Connectors
J4 = 105017-0001; DESCRIPTION: USB - micro B USB 2.0 Receptacle Connector 5 Position Surface Mount, Right Angle; Through Hole; DIGI-KEY_PART_NUMBER: WM1399CT-ND; DIGI-KEY_PURCHASE_URL: https://www.digikey.com/product-detail/en/molex/1050170001/WM1399CT-ND/2350885?utm_source=snapeda&utm_medium=aggregator&utm_campaign=symbol; MF: Molex; MP: 1050170001; PACKAGE: None
J5 = 132134-15; AVAILABILITY: Unavailable; DESCRIPTION: RF Connector SMA Straight PCB Jack Surface Mount 50 Ohm; MF: Amphenol RF; MP: 132134-15; PACKAGE: None; PRICE: None
J6 = S2B-PH-K-S_LF__SN_; DESCRIPTION: Connector Header Through Hole, Right Angle 2 position 0.079 _2.00mm_; DIGI-KEY_PART_NUMBER: 455-1719-ND; DIGI-KEY_PURCHASE_URL: https://www.digikey.com/product-detail/en/jst-sales-america-inc/S2B-PH-K-S_LF__SN_/455-1719-ND/926626?utm_source=snapeda&utm_medium=aggregator&utm_campaign=symbol; MF: JST Sales; MP: S2B-PH-K-S_LF__SN_; PACKAGE: None
J8 = SparkFun-Connectors; PROD_ID: CONN-08197
L1 = rcl-raft; BUILT_BY: EMA_TJ; COPYRIGHT: Copyright (C) 2018 Accelerated Designs. All rights reserved; MANUFACTURER_PART_NUMBER: LQG15HS6N8J02D; VENDOR: Murata
L2 = RAFT-components; DESCRIPTION: Inductor RF Chip Multi-Layer 33nH 5% 100MHz 8Q-Factor Air 200mA 580mOhm DCR 0402 T/R; DIGI-KEY_PART_NUMBER: 490-2629-1-ND; DIGI-KEY_PURCHASE_URL: https://www.digikey.com/product-detail/en/murata-electronics/LQG15HS33NJ02D/490-2629-1-ND/662909?utm_source=snapeda&utm_medium=aggregator&utm_campaign=symbol; MF: Murata; MP: LQG15HS33NJ02D; PACKAGE: 1005 Murata
L3 = RAFT-components; DESCRIPTION: 10nH Unshielded Multilayer Inductor 500mA 260mOhm Max 0402 _1005 Metric_; DIGI-KEY_PART_NUMBER: 490-2623-1-ND; DIGI-KEY_PURCHASE_URL: https://www.digikey.com/product-detail/en/murata-electronics/LQG15HS10NJ02D/490-2623-1-ND/662903?utm_source=snapeda&utm_medium=aggregator&utm_campaign=symbol; MF: Murata; MP: LQG15HS10NJ02D; PACKAGE: 1005 Murata
L4 = RAFT-components; DESCRIPTION: 5.6nH Unshielded Multilayer Inductor 650mA 180mOhm Max 0402 _1005 Metric_; DIGI-KEY_PART_NUMBER: 490-15129-1-ND; DIGI-KEY_PURCHASE_URL: https://www.digikey.com/product-detail/en/murata-electronics/LQG15HS5N6C02D/490-15129-1-ND/6799794?utm_source=snapeda&utm_medium=aggregator&utm_campaign=symbol; MF: Murata; MP: LQG15HS5N6C02D; PACKAGE: 1005 Murata
L5 = RAFT-components; DESCRIPTION: Inductor RF Chip Multi-Layer 8.2nH 5% 100MHz 8Q-Factor Air 300mA 240mOhm DCR 0402 T/R; DIGI-KEY_PART_NUMBER: 490-2622-6-ND; DIGI-KEY_PURCHASE_URL: https://www.digikey.com/product-detail/en/murata-electronics/LQG15HS8N2J02D/490-2622-6-ND/1825762?utm_source=snapeda&utm_medium=aggregator&utm_campaign=symbol; MF: Murata; MP: LQG15HS8N2J02D; PACKAGE: 1005 Murata
L6 = RAFT-components; DESCRIPTION: Fixed Ind 7.5nh 500ma 240 Mohm; DIGI-KEY_PART_NUMBER: 490-15095-1-ND; DIGI-KEY_PURCHASE_URL: https://www.digikey.com/product-detail/en/murata-electronics/LQG15HN7N5H02D/490-15095-1-ND/6799760?utm_source=snapeda&utm_medium=aggregator&utm_campaign=symbol; MF: Murata; MP: LQG15HN7N5H02D; PACKAGE: 1005 Murata
L7 = rcl-raft; DESCRIPTION: Fixed Ind 2nh 900ma 90 Mohm; DIGI-KEY_PART_NUMBER: 490-15076-1-ND; DIGI-KEY_PURCHASE_URL: https://www.digikey.com/product-detail/en/murata-electronics/LQG15HN2N0C02D/490-15076-1-ND/6799741?utm_source=snapeda&utm_medium=aggregator&utm_campaign=symbol; MF: Murata; MP: LQG15HN2N0C02D; PACKAGE: 1005 Murata
L8 = rcl-raft; DESCRIPTION: 5.6nH Unshielded Multilayer Inductor 650mA 180mOhm Max 0402 _1005 Metric_; DIGI-KEY_PART_NUMBER: 490-15129-1-ND; DIGI-KEY_PURCHASE_URL: https://www.digikey.com/product-detail/en/murata-electronics/LQG15HS5N6C02D/490-15129-1-ND/6799794?utm_source=snapeda&utm_medium=aggregator&utm_campaign=symbol; MF: Murata; MP: LQG15HS5N6C02D; PACKAGE: 1005 Murata
L9 = RAFT-components; DESCRIPTION: FIXED IND 1.5UH 800MA 288 MOHM; DIGI-KEY_PART_NUMBER: 490-17890-1-ND; DIGI-KEY_PURCHASE_URL: https://www.digikey.com/product-detail/en/murata-electronics/LQM18PN1R5MFRL/490-17890-1-ND/8540126?utm_source=snapeda&utm_medium=aggregator&utm_campaign=symbol; MF: Murata; MP: LQM18PN1R5MFRL; PACKAGE: 1608 Murata
L10 = RAFT-components; DESCRIPTION: 10µH Shielded Multilayer Inductor 50mA 1.17Ohm Max 0603 _1608 Metric_; DIGI-KEY_PART_NUMBER: 490-4025-1-ND; DIGI-KEY_PURCHASE_URL: https://www.digikey.com/product-detail/en/murata-electronics/LQM18FN100M00D/490-4025-1-ND/1016285?utm_source=snapeda&utm_medium=aggregator&utm_campaign=symbol; MF: Murata Electronics; MP: LQM18FN100M00D; PACKAGE: 1608 Murata
Q1 = RAFT-components
Q2 Q4 = RAFT-components; ALLIED_NUMBER: 70459563; ALLIED_PRICE-STOCK: https://www.alliedelec.com/siliconix-vishay-si7288dp-t1-ge3/70459563/; DESCRIPTION: Trans MOSFET N-CH 40V 10An Vishay SI7288DP-T1-GE3 Dual N-channel MOSFET Transistor, 20 A, 40 V, 8-Pin PowerPAK SO; HEIGHT: mm; MANUFACTURER_NAME: Vishay; MANUFACTURER_PART_NUMBER: SI7288DP-T1-GE3; MOUSER_PART_NUMBER: 781-SI7288DP-T1-GE3; MOUSER_PRICE-STOCK: https://www.mouser.com/Search/Refine.aspx?Keyword=781-SI7288DP-T1-GE3; RS_PART_NUMBER: 8181390P; RS_PRICE-STOCK: http://uk.rs-online.com/web/p/products/8181390P
R1 = rcl-raft; DESCRIPTION: Res Thick Film 0402 15K Ohm 5% 0.063W_1/16W_ ±200ppm/C Molded SMD Automotive Paper T/R; DIGI-KEY_PART_NUMBER: 541-15KJCT-ND; DIGI-KEY_PURCHASE_URL: https://www.digikey.com/product-detail/en/vishay-dale/CRCW040215K0JNED/541-15KJCT-ND/1182712?utm_source=snapeda&utm_medium=aggregator&utm_campaign=symbol; MF: Vishay Dale; MP: CRCW040215K0JNED; PACKAGE: 1005 Panasonic Electronic Components
R2-R4 = rcl-raft; DESCRIPTION: 0 Ohms Jumper 0.063W, 1/16W Chip Resistor 0402 _1005 Metric_ Automotive AEC-Q200 Thick Film; DIGI-KEY_PART_NUMBER: 541-0.0JCT-ND; DIGI-KEY_PURCHASE_URL: https://www.digikey.com/product-detail/en/vishay-dale/CRCW04020000Z0ED/541-0.0JCT-ND/1182611?utm_source=snapeda&utm_medium=aggregator&utm_campaign=symbol; MF: Vishay; MP: CRCW04020000Z0ED; PACKAGE: 1005 Panasonic Electronic Components
R5 R10 R19 = RAFT-components; DESCRIPTION: 100 kOhms ±1% 0.063W, 1/16W Chip Resistor 0402 _1005 Metric_ Automotive AEC-Q200 Thick Film; DIGI-KEY_PART_NUMBER: 541-100KLCT-ND; DIGI-KEY_PURCHASE_URL: https://www.digikey.com/product-detail/en/vishay-dale/CRCW0402100KFKED/541-100KLCT-ND/1183351?utm_source=snapeda&utm_medium=aggregator&utm_campaign=symbol; MF: Vishay; MP: CRCW0402100KFKED; PACKAGE: 1005 Panasonic Electronic Components
R6 = RAFT-components; DESCRIPTION: D10/CRCW0402-C 100 470K 1% ET7; DIGI-KEY_PART_NUMBER: 541-4081-1-ND; DIGI-KEY_PURCHASE_URL: https://www.digikey.com/product-detail/en/vishay-dale/CRCW0402470KFKEDC/541-4081-1-ND/7928764?utm_source=snapeda&utm_medium=aggregator&utm_campaign=symbol; MF: Vishay; MP: CRCW0402470KFKEDC; PACKAGE: 1005 Yageo
R7 = RAFT-components; DESCRIPTION: Res Thick Film 0402 150K Ohm 1% 0.063W_1/16W_ ±100ppm/°C Pad SMD T/R; DIGI-KEY_PART_NUMBER: 541-4008-1-ND; DIGI-KEY_PURCHASE_URL: https://www.digikey.com/product-detail/en/vishay-dale/CRCW0402150KFKEDC/541-4008-1-ND/7928691?utm_source=snapeda&utm_medium=aggregator&utm_campaign=symbol; MF: Vishay Dale; MP: CRCW0402150KFKEDC; PACKAGE: 1005 Yageo
R8 = CRCW04024K70JNEDC; DESCRIPTION: D10/CRCW0402-C 200 4K7 5% ET7; DIGI-KEY_PART_NUMBER: 541-3974-1-ND; DIGI-KEY_PURCHASE_URL: https://www.digikey.com/product-detail/en/vishay-dale/CRCW04024K70JNEDC/541-3974-1-ND/7928657?utm_source=snapeda&utm_medium=aggregator&utm_campaign=symbol; MF: Vishay; MP: CRCW04024K70JNEDC; PACKAGE: 1005 Yageo
R9 R23 R24 R27 = RAFT-components; DESCRIPTION: 10 kOhms ±5% 0.063W, 1/16W Chip Resistor 0402 _1005 Metric_ Automotive AEC-Q200 Thick Film; DIGI-KEY_PART_NUMBER: 541-10KJCT-ND; DIGI-KEY_PURCHASE_URL: https://www.digikey.com/product-detail/en/vishay-dale/CRCW040210K0JNED/541-10KJCT-ND/1182708?utm_source=snapeda&utm_medium=aggregator&utm_campaign=symbol; MF: Vishay Dale; MP: CRCW040210K0JNED; PACKAGE: 1005 Panasonic Electronic Components
R11 R12 = RAFT-components; DESCRIPTION: Res Thick Film 0402 499 Ohm 1% 0.063W_1/16W_ ±100ppm/°C Pad SMD T/R; DIGI-KEY_PART_NUMBER: 541-4007-1-ND; DIGI-KEY_PURCHASE_URL: https://www.digikey.com/product-detail/en/vishay-dale/CRCW0402499RFKEDC/541-4007-1-ND/7928690?utm_source=snapeda&utm_medium=aggregator&utm_campaign=symbol; MF: Vishay; MP: CRCW0402499RFKEDC; PACKAGE: 1005 Yageo
R13 = CRCW040236K0FKED; DESCRIPTION: Surface Mount Thick Film Resistor, AEC-Q200 CRCW Series, 36 kohm, 63 mW, - 1%, 50 V; DIGI-KEY_PART_NUMBER: 541-36.0KLCT-ND; DIGI-KEY_PURCHASE_URL: https://www.digikey.com/product-detail/en/vishay-dale/CRCW040236K0FKED/541-36.0KLCT-ND/1183299?utm_source=snapeda&utm_medium=aggregator&utm_campaign=symbol; MF: Vishay; MP: CRCW040236K0FKED; PACKAGE: 1005 Panasonic Electronic Components
R14 = CRCW04022K00FKED; DESCRIPTION: 2 kOhms ±1% 0.063W, 1/16W Chip Resistor 0402 _1005 Metric_ Automotive AEC-Q200 Thick Film; DIGI-KEY_PART_NUMBER: 541-2.00KLCT-ND; DIGI-KEY_PURCHASE_URL: https://www.digikey.com/product-detail/en/vishay-dale/CRCW04022K00FKED/541-2.00KLCT-ND/1183155?utm_source=snapeda&utm_medium=aggregator&utm_campaign=symbol; MF: Vishay Dale; MP: CRCW04022K00FKED; PACKAGE: 1005 Panasonic Electronic Components
R15 = CRCW040210R0JNEDC; DESCRIPTION: D10/CRCW0402-C 200 10R 5% ET7; DIGI-KEY_PART_NUMBER: 541-4122-1-ND; DIGI-KEY_PURCHASE_URL: https://www.digikey.com/product-detail/en/vishay-dale/CRCW040210R0JNEDC/541-4122-1-ND/7928805?utm_source=snapeda&utm_medium=aggregator&utm_campaign=symbol; MF: Vishay; MP: CRCW040210R0JNEDC; PACKAGE: 1005 Yageo
R16 R17 R21 = CRCW040210K0JNED; DESCRIPTION: 10 kOhms ±5% 0.063W, 1/16W Chip Resistor 0402 _1005 Metric_ Automotive AEC-Q200 Thick Film; DIGI-KEY_PART_NUMBER: 541-10KJCT-ND; DIGI-KEY_PURCHASE_URL: https://www.digikey.com/product-detail/en/vishay-dale/CRCW040210K0JNED/541-10KJCT-ND/1182708?utm_source=snapeda&utm_medium=aggregator&utm_campaign=symbol; MF: Vishay Dale; MP: CRCW040210K0JNED; PACKAGE: 1005 Panasonic Electronic Components
R18 = rcl-raft; DESCRIPTION: Res Thick Film 0402 499 Ohm 1% 0.063W_1/16W_ ±100ppm/°C Pad SMD T/R; DIGI-KEY_PART_NUMBER: 541-4007-1-ND; DIGI-KEY_PURCHASE_URL: https://www.digikey.com/product-detail/en/vishay-dale/CRCW0402499RFKEDC/541-4007-1-ND/7928690?utm_source=snapeda&utm_medium=aggregator&utm_campaign=symbol; MF: Vishay; MP: CRCW0402499RFKEDC; PACKAGE: 1005 Yageo
R20 = RAFT-components; DESCRIPTION: 20 kOhms ±1% 0.063W, 1/16W Chip Resistor 0402 _1005 Metric_ Thick Film; DIGI-KEY_PART_NUMBER: 541-3969-1-ND; DIGI-KEY_PURCHASE_URL: https://www.digikey.com/product-detail/en/vishay-dale/CRCW040220K0FKEDC/541-3969-1-ND/7928652?utm_source=snapeda&utm_medium=aggregator&utm_campaign=symbol; MF: Vishay; MP: CRCW040220K0FKEDC; PACKAGE: 1005 Yageo
R25 = RAFT-components; DESCRIPTION: 5.23 kOhms ±1% 0.063W, 1/16W Chip Resistor 0402 _1005 Metric_ Automotive AEC-Q200 Thick Film; DIGI-KEY_PART_NUMBER: 541-5.23KLCT-ND; DIGI-KEY_PURCHASE_URL: https://www.digikey.com/product-detail/en/vishay-dale/CRCW04025K23FKED/541-5.23KLCT-ND/1183205?utm_source=snapeda&utm_medium=aggregator&utm_campaign=symbol; MF: Vishay Dale; MP: CRCW04025K23FKED; PACKAGE: 1005 Panasonic Electronic Components
R26 = RAFT-components; DESCRIPTION: Res Thick Film 0402 30.1K Ohm 1% 0.063W_1/16W_ ±100ppm/C Molded SMD Automotive Paper T/R; DIGI-KEY_PART_NUMBER: 541-30.1KLCT-ND; DIGI-KEY_PURCHASE_URL: https://www.digikey.com/product-detail/en/vishay-dale/CRCW040230K1FKED/541-30.1KLCT-ND/1183290?utm_source=snapeda&utm_medium=aggregator&utm_campaign=symbol; MF: Vishay; MP: CRCW040230K1FKED; PACKAGE: 1005 Panasonic Electronic Components
R_SR = ERJ-3BWFR020V; DESCRIPTION: Res Thick Film 0603 0.02 Ohm 1% 0.25W_1/4W_ ±250ppm/C Pad SMD Automotive T/R; DIGI-KEY_PART_NUMBER: P17461CT-ND; DIGI-KEY_PURCHASE_URL: https://www.digikey.com/product-detail/en/panasonic-electronic-components/ERJ-3BWFR020V/P17461CT-ND/5647945?utm_source=snapeda&utm_medium=aggregator&utm_campaign=symbol; MF: Panasonic; MP: ERJ-3BWFR020V; PACKAGE: 1608 Panasonic Electronic Components
S1 S2 = SparkFun-Switches; PROD_ID: SWCH-08441; SF_SKU: COM-00097
TR1 = discrete
U1 = Semtech-rf; AVAILABILITY: Unavailable; DESCRIPTION: RF Transceiver FSK/GFSK/MSK/GMSK/LoRa/OOK 137MHz to 1020MHz 28-Pin QFN; MF: Semtech Corporation; MP: SX1276; PACKAGE: VQFN-28 Semtech Corporation; PRICE: None
U2 = MAX2771ETI_; AVAILABILITY: Unavailable; DESCRIPTION: NEXT-GENERATION GLOBAL NAVIGATIO; MF: Maxim Integrated; MP: MAX2771ETI+; PACKAGE: TQFN-28 Maxim; PRICE: None
U3 = Espressif; AVAILABILITY: Unavailable; DESCRIPTION: Smd Ic Esp32-D0wd, Dual Core Mcu; MF: Espressif Systems; MP: ESP32-D0WD; PACKAGE: VFQFN-48 Espressif Systems; PRICE: None
U4 = Winbond; AVAILABILITY: Unavailable; DESCRIPTION: FLASH - NOR Memory IC 16Mb _2M x 8_ SPI 104MHz 8-SOIC; MF: Winbond; MP: W25Q16BVSSIG; PACKAGE: SOIC-8 Winbond; PRICE: None
U5 = INTERFACE-CP2102-GMR_QFN28_; AVAILABILITY: Unavailable; DESCRIPTION: USB Bridge, USB to UART USB 2.0 UART Interface 28-QFN _5x5_; MF: Silicon; MP: CP2102-GMR; PACKAGE: VFQFN-28 Vishay Siliconix; PRICE: None
U6 = PE4259; AVAILABILITY: Unavailable; MF: pSemi; MP: PE4259; PACKAGE: SOT-363 Peregrine Semiconductor; PRICE: None
U7 = SP0503BAHT; DESCRIPTION: 8.5V Clamp Ipp Tvs Diode Surface Mount SOT-143-4; DIGI-KEY_PART_NUMBER: SP0503BAHT-ND; DIGI-KEY_PURCHASE_URL: https://www.digikey.com/product-detail/en/littelfuse-inc/SP0503BAHT/SP0503BAHT-ND/485122?utm_source=snapeda&utm_medium=aggregator&utm_campaign=symbol; MF: Littelfuse Inc.; MP: SP0503BAHT; PACKAGE: SOT-143 Littelfuse
U8 = TexasInstruments; AVAILABILITY: Unavailable; DESCRIPTION: Charger IC Multi-Chemistry 16-VQFN _3.5x3.5_; MF: Texas Instruments; MP: BQ24650RVAR; PACKAGE: VFQFN-16 Murata Power Solutions; PRICE: None
U9 = TPS63070RNMT; AVAILABILITY: Unavailable; DESCRIPTION: Conv DC-DC 2V to 16V Step Down/Step Up Single-Out 2.5V to 9V 2A 15-Pin VQFN-HR T/R; MF: Texas Instruments; MP: TPS63070RNMT; PACKAGE: VQFN-15 Texas Instruments; PRICE: None
U10 = PeregrineSemi; AVAILABILITY: Unavailable; MF: pSemi; MP: PE4259; PACKAGE: SOT-363 Peregrine Semiconductor; PRICE: None
U$1 = rcl-raft; MANUFACTURER: NDK America, Inc.
U$2 U$4 = RAFT-components; MANUFACTURER: NDK America, Inc.
Y1 = rcl-raft; AVAILABILITY: Unavailable; DESCRIPTION: FC-135 series 32.768kHz ±20ppm Crystal 9pF 50 kOhms, -40°C ~ 85°C, Surface Mount 2-SMD, No Lead; MF: EPSON; MP: FC-135R 32.7680KA-AC3; PACKAGE: SMD-2 Epson; PRICE: None

## Nets
2G4_ANT_SEL: U3.14 U10.4
2G4_INT_ANT: ANT1.1 U10.3
!RST: R8.1 U5.9
+1.8V: C39.2 U3.26 U4.8
+3.3V: C4.2 C5.2 C6.2 C7.2 C8.2 C9.2 C10.2 C11.2 C16.1 C19.1 C21.1 C23.1 C33.1 C34.1 C35.2 C36.2 C37.1 C38.1 C40.1 C69.2 C74.1 J3.16 J3.18 L7.2 R8.2 U1.3 U1.14 U1.24 U2.2 U2.6 U2.14 U2.22 U2.27 U2.28 U3.1 U3.19 U3.37 U3.43 U3.46 U6.6 U10.6
+3V3: C47.2 C48.2 C49.2 C53.1 J7.1 R5.2 R6.1 U9.7-8
+5V: C54.2 C55.2 D5.1 D5.2 J3.15 J3.17 J4.1 U5.7 U5.8 U7.2
CHIP_PU: C72.2 C73.2 Q4.7 Q4.8 R23.1 S1.3 U3.9
CLK_SER: U2.12 U3.15
DATA_OUT: U2.13 U3.16
DATA_SYNC: U2.10 U3.11
DTR: C72.1 Q4.2 Q4.3 U5.28
GND: ANT1.2 ANT1.3 ANT1.5 ANT1.6 ANT1.7 ANT1.8 C1.1 C3.1 C4.1 C5.1 C6.1 C7.1 C8.1 C9.1 C10.1 C11.1 C12.1 C14.1 C15.1 C16.2 C17.1 C18.2 C19.2 C20.2 C21.2 C22.1 C23.2 C24.1 C25.1 C28.1 C29.1 C30.1 C31.1 C32.1 C33.2 C34.2 C35.1 C36.1 C37.2 C38.2 C39.1 C40.2 C43.1 C44.1 C45.1 C46.1 C47.1 C48.1 C49.1 C50.2 C51.2 C52.2 C53.2 C54.1 C55.1 C56.1 C57.1 C58.1 C59.2 C60.2 C61.2 C63.1 C65.1 C66.1 C68.2 C69.1 C71.2 C73.1 C74.2 D6.1 J1.P1 J1.P2 J1.P3 J1.P4 J2.P1 J2.P2 J2.P3 J2.P4 J3.19 J3.20 J4.5 J4.P$1 J4.P$2 J4.P$8 J4.P$9 J5.P1 J5.P2 J5.P3 J5.P4 J6.2 J8.GND J8.GNDBREAK L4.1 Q2.3 R7.1 R9.2 R10.1 R13.1 R19.1 R23.2 R24.2 R26.1 S1.1 S2.1 TR1.2 U1.1 U1.15 U1.23 U1.26 U1.29 U2.20 U2.26 U2.29 U3.49 U4.4 U5.3 U5.29 U6.2 U7.1 U8.11 U8.17 U9.4 U9.6 U9.10 U9.15 U10.2 U$1.2 U$1.4 U$2.2 U$2.4 U$4.2 U$4.4
GPIO0: J3.14 U3.23
GPIO2: J3.12 U3.22
GPIO3: J3.10 U3.24
GPIO4: J3.8 U3.34
GPIO15: J3.6 U3.21
GPIO16: J3.4 U3.25
GPIO17: J3.2 U3.27
GPS_ANT_SEL: U3.36 U6.4
GPS_CS: U2.9 U3.39
GPS_INT_ANT: ANT1.4 U6.1
GPS_SHDN: U2.18 U3.42
N$1: C1.2 R1.1 U2.1
N$2: C3.2 R1.2
N$3: C2.2 U2.24
N$4: C2.1 U2.25
N$5: L1.1 U2.19
N$6: C13.1 U6.5
N$7: J2.1 U6.3
N$8: C12.2 C13.2 L1.2
N$9: C15.2 R4.1 U$1.3
N$10: C24.2 C25.2 L2.2 U1.25
N$11: C14.2 U2.3 U$1.1
N$12: C18.1 U1.2
N$13: C22.2 R3.1 U$2.1
N$14: C20.1 U1.4
N$15: C17.2 U1.6 U$2.3
N$16: C26.1 L2.1 L3.1 U1.22
N$17: C26.2 L4.2 U1.21
N$18: C27.1 L3.2
N$19: C27.2 C28.2 L5.1
N$20: C29.2 L5.2 L6.1
N$21: C30.2 J1.1 L6.2
N$22: R2.1 U3.45
N$23: C31.2 U3.44 U$4.3
N$24: L7.1 U3.3 U3.4
N$25: C41.1 U3.8
N$26: C41.2 U3.7
N$27: C42.1 U3.6
N$28: C42.2 U3.5
N$29: C52.1 U9.3
N$30: C32.2 R2.2 U$4.1
N$31: R3.2 U1.5
N$32: R18.2 U3.41
N$33: R4.2 U2.4
N$34: U3.30 U4.1
N$35: U3.31 U4.6
N$36: U3.28 U4.7
N$37: U3.29 U4.3
N$38: U3.33 U4.5
N$39: U3.32 U4.2
N$40: C43.2 U3.12 Y1.1
N$41: C46.2 L8.1 U10.5
N$42: C44.2 U3.13 Y1.2
N$43: C45.2 L8.2 U3.2
N$45: L9.1 U9.11
N$46: L9.2 U9.9
N$47: R5.1 U9.2
N$48: Q2.4 U8.13
N$49: R6.2 R7.2 U9.5
N$50: C60.1 R25.2 U8.6 U8.7
N$51: R9.1 U5.11
N$52: D6.2 R21.2
N$53: C56.2 C57.2 U5.6
N$54: J4.3 U5.5 U7.4
N$55: J4.2 U5.4 U7.3
N$56: F1.2 J6.1
N$57: R27.2 U9.1 U9.14
N$58: R12.1 R13.2 U8.2
N$59: C59.1 R15.2 U8.1
N$60: C61.1 D2.1 D2.2 U8.12
N$61: C62.2 D2.3 Q2.2 U8.15 U8.16
N$62: C67.1 R10.2 R11.1 U8.8
N$63: C64.2 L10.2 Q2.1 Q2.5 Q2.6 R_SR.1 U8.10
N$64: J7.2 R21.1
N$65: D4.2 R17.2
N$66: D3.2 R16.2
N$67: D4.1 U8.5
N$68: D3.1 U8.3
N$69: C62.1 L10.1 U8.14
N$70: J5.1 U10.1
N$71: C70.1 R20.2 U3.47
N$72: C58.2 R14.1
N$74: C70.2 C71.1 R20.1 U3.48
PACK_THERM: R25.1 R26.2 TR1.1 U8.4
RTS: Q4.1 Q4.4 U5.24
SC_VIN: C63.2 D1.3 Q2.7 Q2.8 R15.1
SPI_CLK: J3.5 U1.16 U2.8 U3.17
SPI_MISO: J3.1 U1.17 U3.18
SPI_MOSI: J3.3 U1.18 U2.7 U3.20
SX_CS: U1.19 U3.38
SX_INT: U1.8 U3.35
SX_RST: Q4.5 Q4.6 R24.1 S2.3 U1.7
TIME_SYNC: U2.11 U3.10
U0RXD: J3.9 U3.40 U5.25
U0TXD: J3.7 R18.1 U5.26
V_BAT: C64.1 C65.2 C66.2 C67.2 F1.1 Q1.3 R11.2 R_SR.2 U8.9
VIN: D1.1 D1.2 D5.3 J8.PWR Q1.1 Q1.5 R12.2 R14.2 R16.1 R17.1 R19.2
VIN_SYS: C50.1 C51.1 C68.1 Q1.4 Q1.6 R27.1 U9.12-13